# Altium PCB DC-DC.PcbDoc
Units mm, origin at the board's own origin, x right, y up, seen from the top; angles counter-clockwise.
Board outline 26.5 x 18.5 mm, 2 copper layers (Top Layer, Bottom Layer); 19 components, 11 nets, 52 pads, 24 vias.
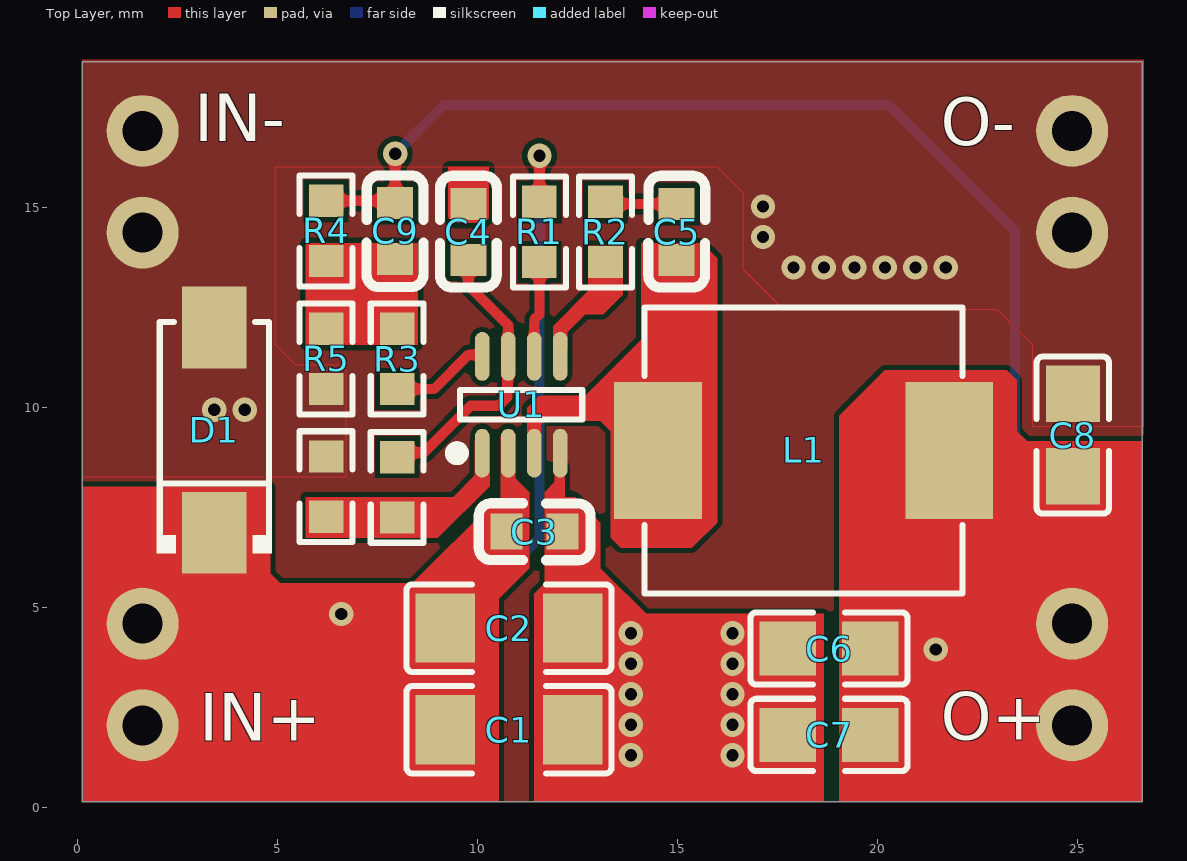
[diagram p0: Top Layer view]
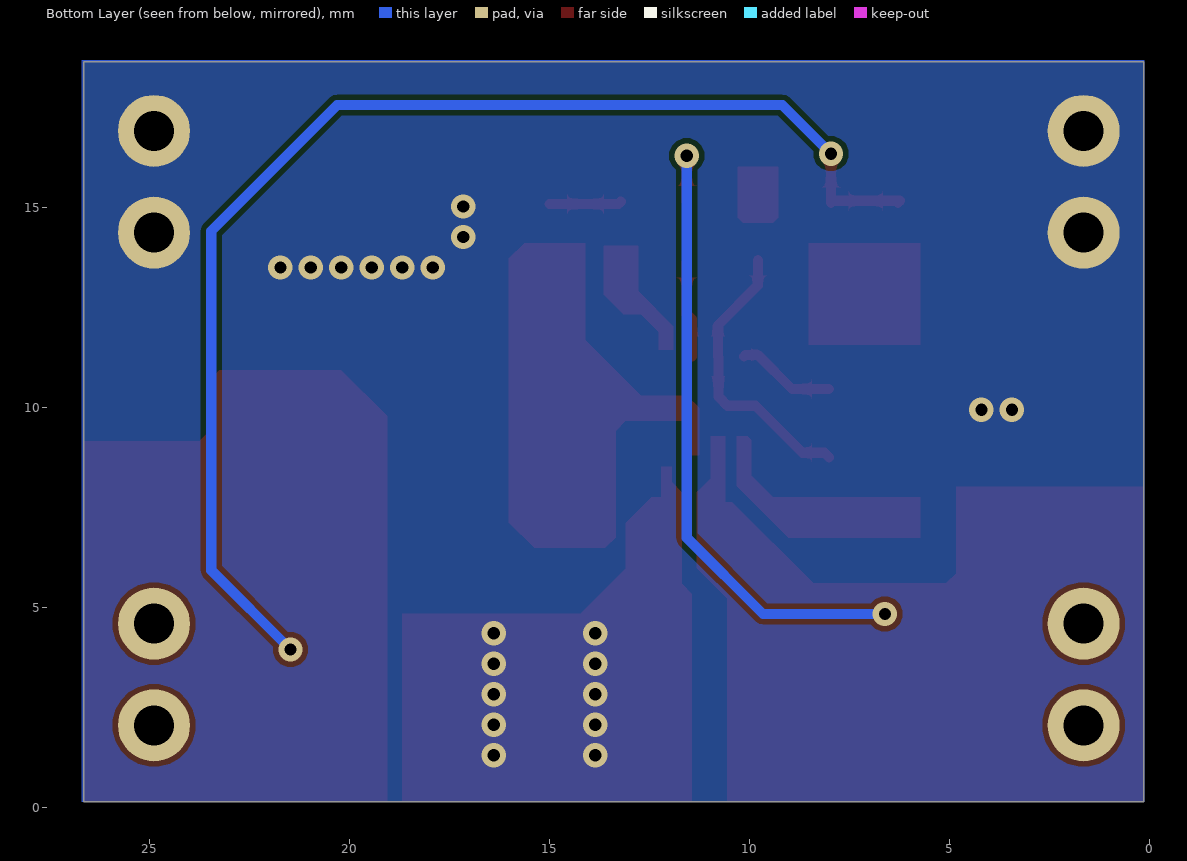
[diagram p1: Bottom Layer view, seen from below]

## Layer stack, top to bottom
Top Solder: solder mask 0.0102, Solder Resist, Dk 3.5
Top Layer: signal copper 0.0356
Dielectric 1: dielectric 0.32, FR-4, Dk 4.8
Bottom Layer: signal copper 0.0356
Bottom Solder: solder mask 0.0102, Solder Resist, Dk 3.5

## Board outline
0.127,0.127 26.627,0.127 26.627,18.627 0.127,18.627

## Design rules (kind name [scope] priority, off if disabled: settings)
Clearance [All] p1: gap=0.127 ignorepadtopadclearanceinfootprint=TRUE
ComponentClearance [All] p1: gap=0.254 collisioncheckmode=3 verticalgap=0.254 showdistances=FALSE donotcheckwithout3dbody=TRUE checkcomponentboundary=TRUE
PolygonConnect [All] p1: connectstyle=Direct reliefconductorwidth=0.254 reliefentries=4 polygonreliefangle="90 Angle" airgapwidth=0.254
RoutingVias [All] p1: holewidth=0.305 width=0.61 viastyle="Through Hole" minholewidth=0.152 minwidth=0.305 maxholewidth=0.711 maxwidth=1.27
SolderMaskExpansion [All] p1: expansion=0.102 istentingtop=FALSE
Width [All] p1: maxlimit=0.254 minlimit=0.254 preferedwidth=0.254
29 further rules are at their usual default settings.

## Classes and differential pairs
component class Sheet1: C1 C2 C3 C4 C5 C6 C7 C8 C9 D1 L1 R1 R2 R3 R4 R5 U1

## Components (designator, comment, footprint, x,y, rotation, side; value= is the part's Value field where it differs from the comment)
C1 "22uf" C1206 10.795,1.93 r180 top
C2 "N/A" C1206 10.795,4.47 r180 top
C3 "0.1uf" C0603 11.43,6.883 r180 top
C4 "0.1uf" C0603 9.779,14.376 r270 top
C5 "0.1uf" C0603 14.986,14.376 r270 top
C6 "22uf" C0805 18.796,3.962 r0 top
C7 "22uf" C0805 18.796,1.803 r0 top
C8 "N/A" C0805 24.892,9.296 r270 top
C9 "33pf" C0603 7.95,14.402 r90 top
D1 "SMAJ12A" SMA_L4.4-W2.8-LS5.4-RD 3.429,9.423 r90 top
L1 "4.7uH" IND-SMD_L7.8-W7.0_MAPM0630F 18.161,8.915 r180 top
R1 "100K" R0603 11.557,14.376 r270 top
R2 "10R" R0603 13.208,14.376 r90 top
R3 "0R" R0603 8.001,11.201 r90 top
R4 "40.2K" R0603 6.223,14.402 r90 top
R5 "5.49K" R0603 6.223,11.201 r90 top
R6 "0" R0603 6.223,8.01 r270 top
R7 "0" R0603 8.001,7.992 r270 top
U1 "MP2225GJ" TSOT23-8 11.049,9.931 r0 top

## Footprints (in the part's own frame and the unit in brackets; to place one, negate y for a bottom-side part, rotate by r counter-clockwise, add the part's x,y. Pads: shape width x height; smd on the part's side, far side on the other; paste and mask are expansions set on the pad)
C0603 [mm]
  rect 0.8x0.9 smd: 1(-0.7,0) 2(0.7,0)
  silkscreen extent -1.41,-0.71 1.39,0.72
C0805 [mm]
  rect 1.41x1.35 smd: 1(-1.03,0) 2(1.03,0)
  silkscreen extent -1.96,-0.9 1.96,0.9
C1206 [mm]
  rect 1.485x1.728 smd: 1(-1.593,0) 2(1.593,0)
  silkscreen extent -2.56,-1.09 2.56,1.09
IND-SMD_L7.8-W7.0_MAPM0630F [mm]
  rect 2.194x3.42 smd: 1(3.643,0) 2(-3.643,0)
  silkscreen extent -3.98,-3.58 3.98,3.58
R0603 [mm]
  rect 0.806x0.864 smd: 1(-0.753,0) 2(0.753,0)
  silkscreen extent -1.39,-0.66 1.39,0.66
SMA_L4.4-W2.8-LS5.4-RD [mm]
  rect 2.046x1.62 smd: 1(-2.566,0) 2(2.565,0)
  silkscreen extent -3.08,-1.44 2.7,1.44
TSOT23-8 [mm]
  oval 0.364x1.222 smd: 1(-0.922,-1.087) 2(-0.272,-1.087) 3(0.378,-1.087) 4(1.028,-1.087) 5(1.028,1.335) 6(0.378,1.335) 7(-0.272,1.335) 8(-0.922,1.335)
  silkscreen extent -1.71,-1.24 1.58,0.5

## Part data
D1: BOM_JLCPCB Part Class="Extended Part", BOM_Manufacturer="Brightking Elec (TAIWAN)", BOM_Manufacturer Part=SMAJ70A, BOM_Supplier=LCSC, BOM_Supplier Part=C309908, Contributor=LCSC, spicePre=D, spiceSymbolName=SMAJ70A
L1: BOM_Manufacturer=Jinlai, BOM_Manufacturer Part=JSHC0630H-150M-G, BOM_Supplier=LCSC, BOM_Supplier Part=C334085, Contributor=LCSC, nameAlias=Inductance, spicePre=L, spiceSymbolName=JSHC0630H-150M-G
R6 R7: library part 100K, Contributor=LCEDA_Lib, nameAlias=Value(Ω), spicePre=R, spiceSymbolName=R_0603_US
C1 C2: Contributor=LCEDA_Lib, nameAlias=Value(F), spicePre=C, spiceSymbolName=C_1206_US
C3 C4 C5 C9: Contributor=LCEDA_Lib, nameAlias=Value(F), spicePre=C, spiceSymbolName=C_0603_US
C6 C7 C8: Contributor=LCEDA_Lib, nameAlias=Value(F), spicePre=C, spiceSymbolName=C_0805_US
R1 R2 R3 R4 R5: Contributor=LCEDA_Lib, nameAlias=Value(Ω), spicePre=R, spiceSymbolName=R_0603_US
U1: Contributor=sunhaoqin, link=https://www.monolithicpower.com/en/documentview/productdocument/index/version/2/document_type/Datasheet/lang/en/sku/MP2225GJ-Z/document_id/922/, spicePre=U, spiceSymbolName=MP2225GJ

## Free pads (board coordinates)
  round 1.8 hole 1: 1(1.636,16.901) 2(1.636,14.361) 3(1.636,4.582) 4(1.636,2.042) 5(24.877,2.042) 6(24.877,4.582) 7(24.877,16.901) 8(24.877,14.361)

## Via types
v1: diameter 0.61, hole 0.305, Top Layer to Bottom Layer, 24 vias

## Nets (pads, with @x,y where several pads share a name; then routed paths per layer and width w, separated by ;. In a path a pad name is that pad's centre, name@x,y a point inside that pad or via, vN(x,y) a via of type N, cw(c..) or ccw(c..) an arc to the next point about the centre after c; other vN are vias at no path point)
+5V: C6.2 C7.2 C8.2 C9.2 L1.2 pad.5 pad.6 R4.2 | length 31.7
  Top Layer w0.254: R4.2@6.276,15.102 R4.2 7.897,15.155 C9.2 v1(7.95,16.332) ; C6.2 C6.2@19.851,3.937
  Bottom Layer w0.254: v1(7.95,16.332) 9.169,17.551 20.295,17.551 23.444,14.402 23.444,5.918 v1(21.463,3.937)
+12V: C1.2 C2.2 C3.2 D1.1 pad.3 pad.4 R1.1 U1.2 | length 16.4
  Top Layer w0.254: R1.1 v1(11.557,16.281)
  Bottom Layer w0.254: v1(6.604,4.826) 9.652,4.826 11.557,6.731 v1(11.557,16.281)
GND: C1.1 C2.1 C3.1 C4.1 C6.1 C7.1 C8.1 D1.2 pad.1 pad.2 pad.7 pad.8 R5.1 R6.1 U1.4
  other v1: 13.843,1.295 16.383,1.295 13.843,2.057 16.383,2.057 13.843,2.819 16.383,2.819 13.843,3.581 16.383,3.581 13.843,4.343 16.383,4.343 3.429,9.931 4.191,9.931 17.907,13.487 18.669,13.487 19.431,13.487 20.193,13.487 20.955,13.487 21.717,13.487 17.145,14.249 17.145,15.011
NetC4_2: C4.2 R7.1 U1.7 | length 7.2
  Top Layer w0.254: R7.1 8.113,8.858 8.665,8.858 9.84,10.033 10.541,10.033 10.761,10.253 10.761,11.25 U1.7 10.777,12.047 9.779,13.044 C4.2
NetC5_1: C5.1 R2.2 | length 1.8
  Top Layer w0.254: R2.2 13.261,15.076 C5.1
NetC5_2: C5.2 L1.1 U1.3
NetC9_1: C9.1 R3.2 R4.1 R5.2
NetR1_2: R1.2 U1.6 | length 2.4
  Top Layer w0.254: U1.6 11.43,11.27 11.43,12.192 11.557,12.319 R1.2
NetR2_1: R2.1 U1.5
NetR3_1: R3.1 U1.8 | length 2.5
  Top Layer w0.254: R3.1 8.924,10.448 9.779,11.303 10.09,11.303 U1.8
NetR6_2: R6.2 R7.2 U1.1

## Polygon pours and split planes (outlines as drawn)
GND on Top Layer "NONET_L01_P-001" (solid, pour order 2): 0.127,18.669 26.67,18.669 26.67,0.17 26.627,0.127 0.127,0.127
GND on Top Layer "GND_L01_P000" (solid, shelved, pour order 0): 0.127,18.669 0.127,8.255 6.731,8.255 6.731,10.922 6.604,11.049 5.461,11.049 4.953,11.557 4.953,16.002 16.002,16.002 16.637,15.367 16.637,13.462 17.653,12.446 22.987,12.446 23.876,11.557 23.876,9.525 26.67,9.525 26.67,18.669
GND on Bottom Layer "NONET_L01_P-001" (solid, pour order 3): 0.127,18.669 0.127,0.127 26.67,0.127 26.67,18.669
GND on Bottom Layer "GND_L02_P001" (solid, shelved, pour order 1): 0.127,18.669 0.127,0.127 26.67,0.127 26.67,18.669

## Other copper
Top Layer:
  region net GND: 9.271,16.002 9.271,14.732 9.398,14.605 10.16,14.605 10.287,14.732 10.287,16.002
  region net NetC5_2: 14.097,14.097 15.621,14.097 16.002,13.716 16.002,7.112 15.367,6.477 13.589,6.477 13.335,6.731 13.335,9.398 13.081,9.652 11.684,9.652 11.605,9.573 11.605,8.788 11.248,8.788 11.248,9.978 11.557,10.287 12.7,10.287 14.097,11.684
  region net +5V: 19.05,0.127 19.05,9.779 20.193,10.922 23.241,10.922 23.495,10.668 23.495,9.398 23.749,9.144 26.627,9.144 26.627,0.127
  region net NetR2_1: 12.774,14.027 12.774,12.901 11.896,12.023 11.896,11.43 12.258,11.43 12.258,11.874 12.703,12.319 13.147,12.319 13.638,12.81 13.638,14.027
  region net +12V: 10.594,9.271 10.594,7.62 10.414,7.62 8.382,5.588 0.127,5.588 0.127,0.127 10.541,0.127 10.541,5.207 11.303,5.969 11.303,7.874 10.958,8.219 10.958,9.271
  region net NetC9_1: 5.715,14.097 5.715,11.557 8.509,11.557 8.509,14.097
  region net GND: 18.669,4.826 18.669,0.127 11.43,0.127 11.43,5.334 11.684,5.588 11.684,7.874 11.938,8.128 11.938,8.509 12.192,8.509 12.192,7.747 12.446,7.747 13.081,7.112 13.081,5.969 13.208,5.842 14.224,4.826
  region net +12V: 5.08,5.588 4.826,5.842 4.826,8.001 0.127,8.001 0.127,5.588
  region net NetR6_2: 5.715,7.747 9.398,7.747 9.945,8.294 9.945,9.183 10.033,9.271 10.309,9.271 10.309,8.023 9.017,6.731 5.715,6.731

## Silkscreen, mask and mechanical layers (free items; w line width, h text height)
Top Overlay:
  text "IN-" at 2.921,16.256 h2.03
  text "O-" at 21.59,16.15 h2.03
  text "O+" at 21.59,1.291 h2.03
  text "IN+" at 3.048,1.27 h2.03